# Altium PCB PCB1.PcbDoc (part 1 of 2)
Units mm, origin at the board's own origin, x right, y up, seen from the top; angles counter-clockwise.
Board outline 100 x 100 mm, 2 copper layers (Top Layer, Bottom Layer); 175 components, 138 nets, 674 pads, 476 vias.
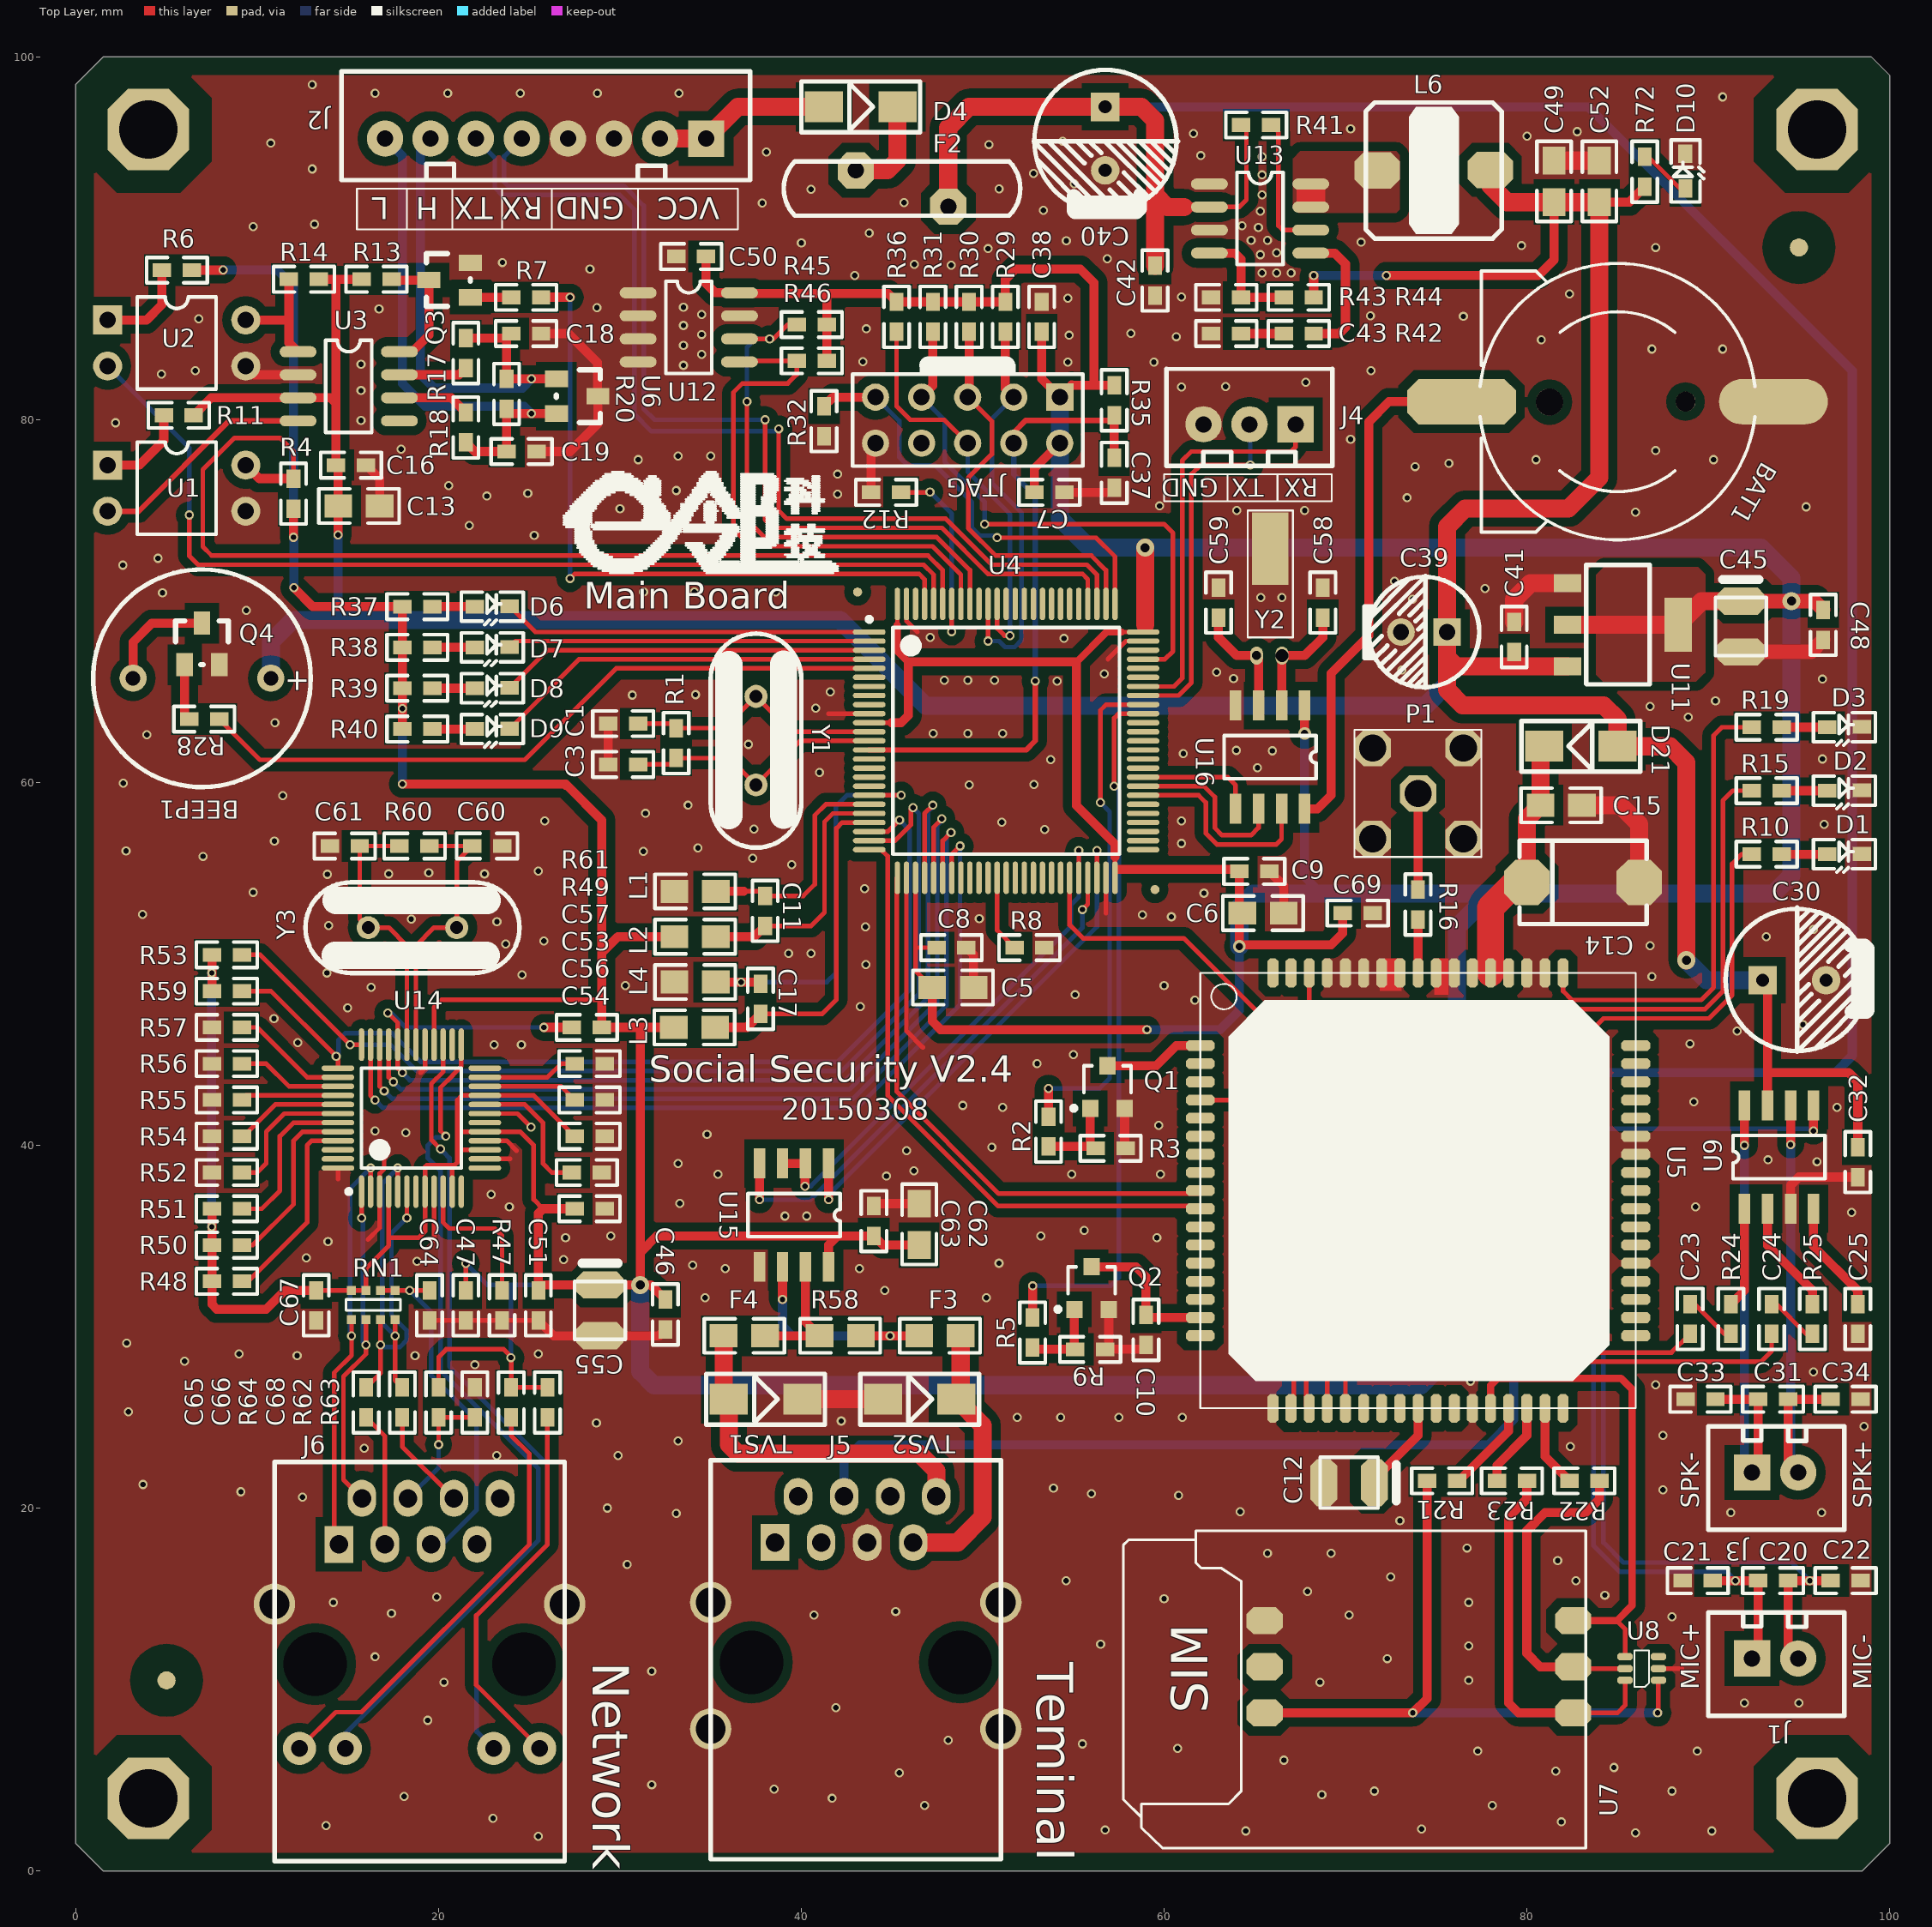
[diagram p0: Top Layer view]
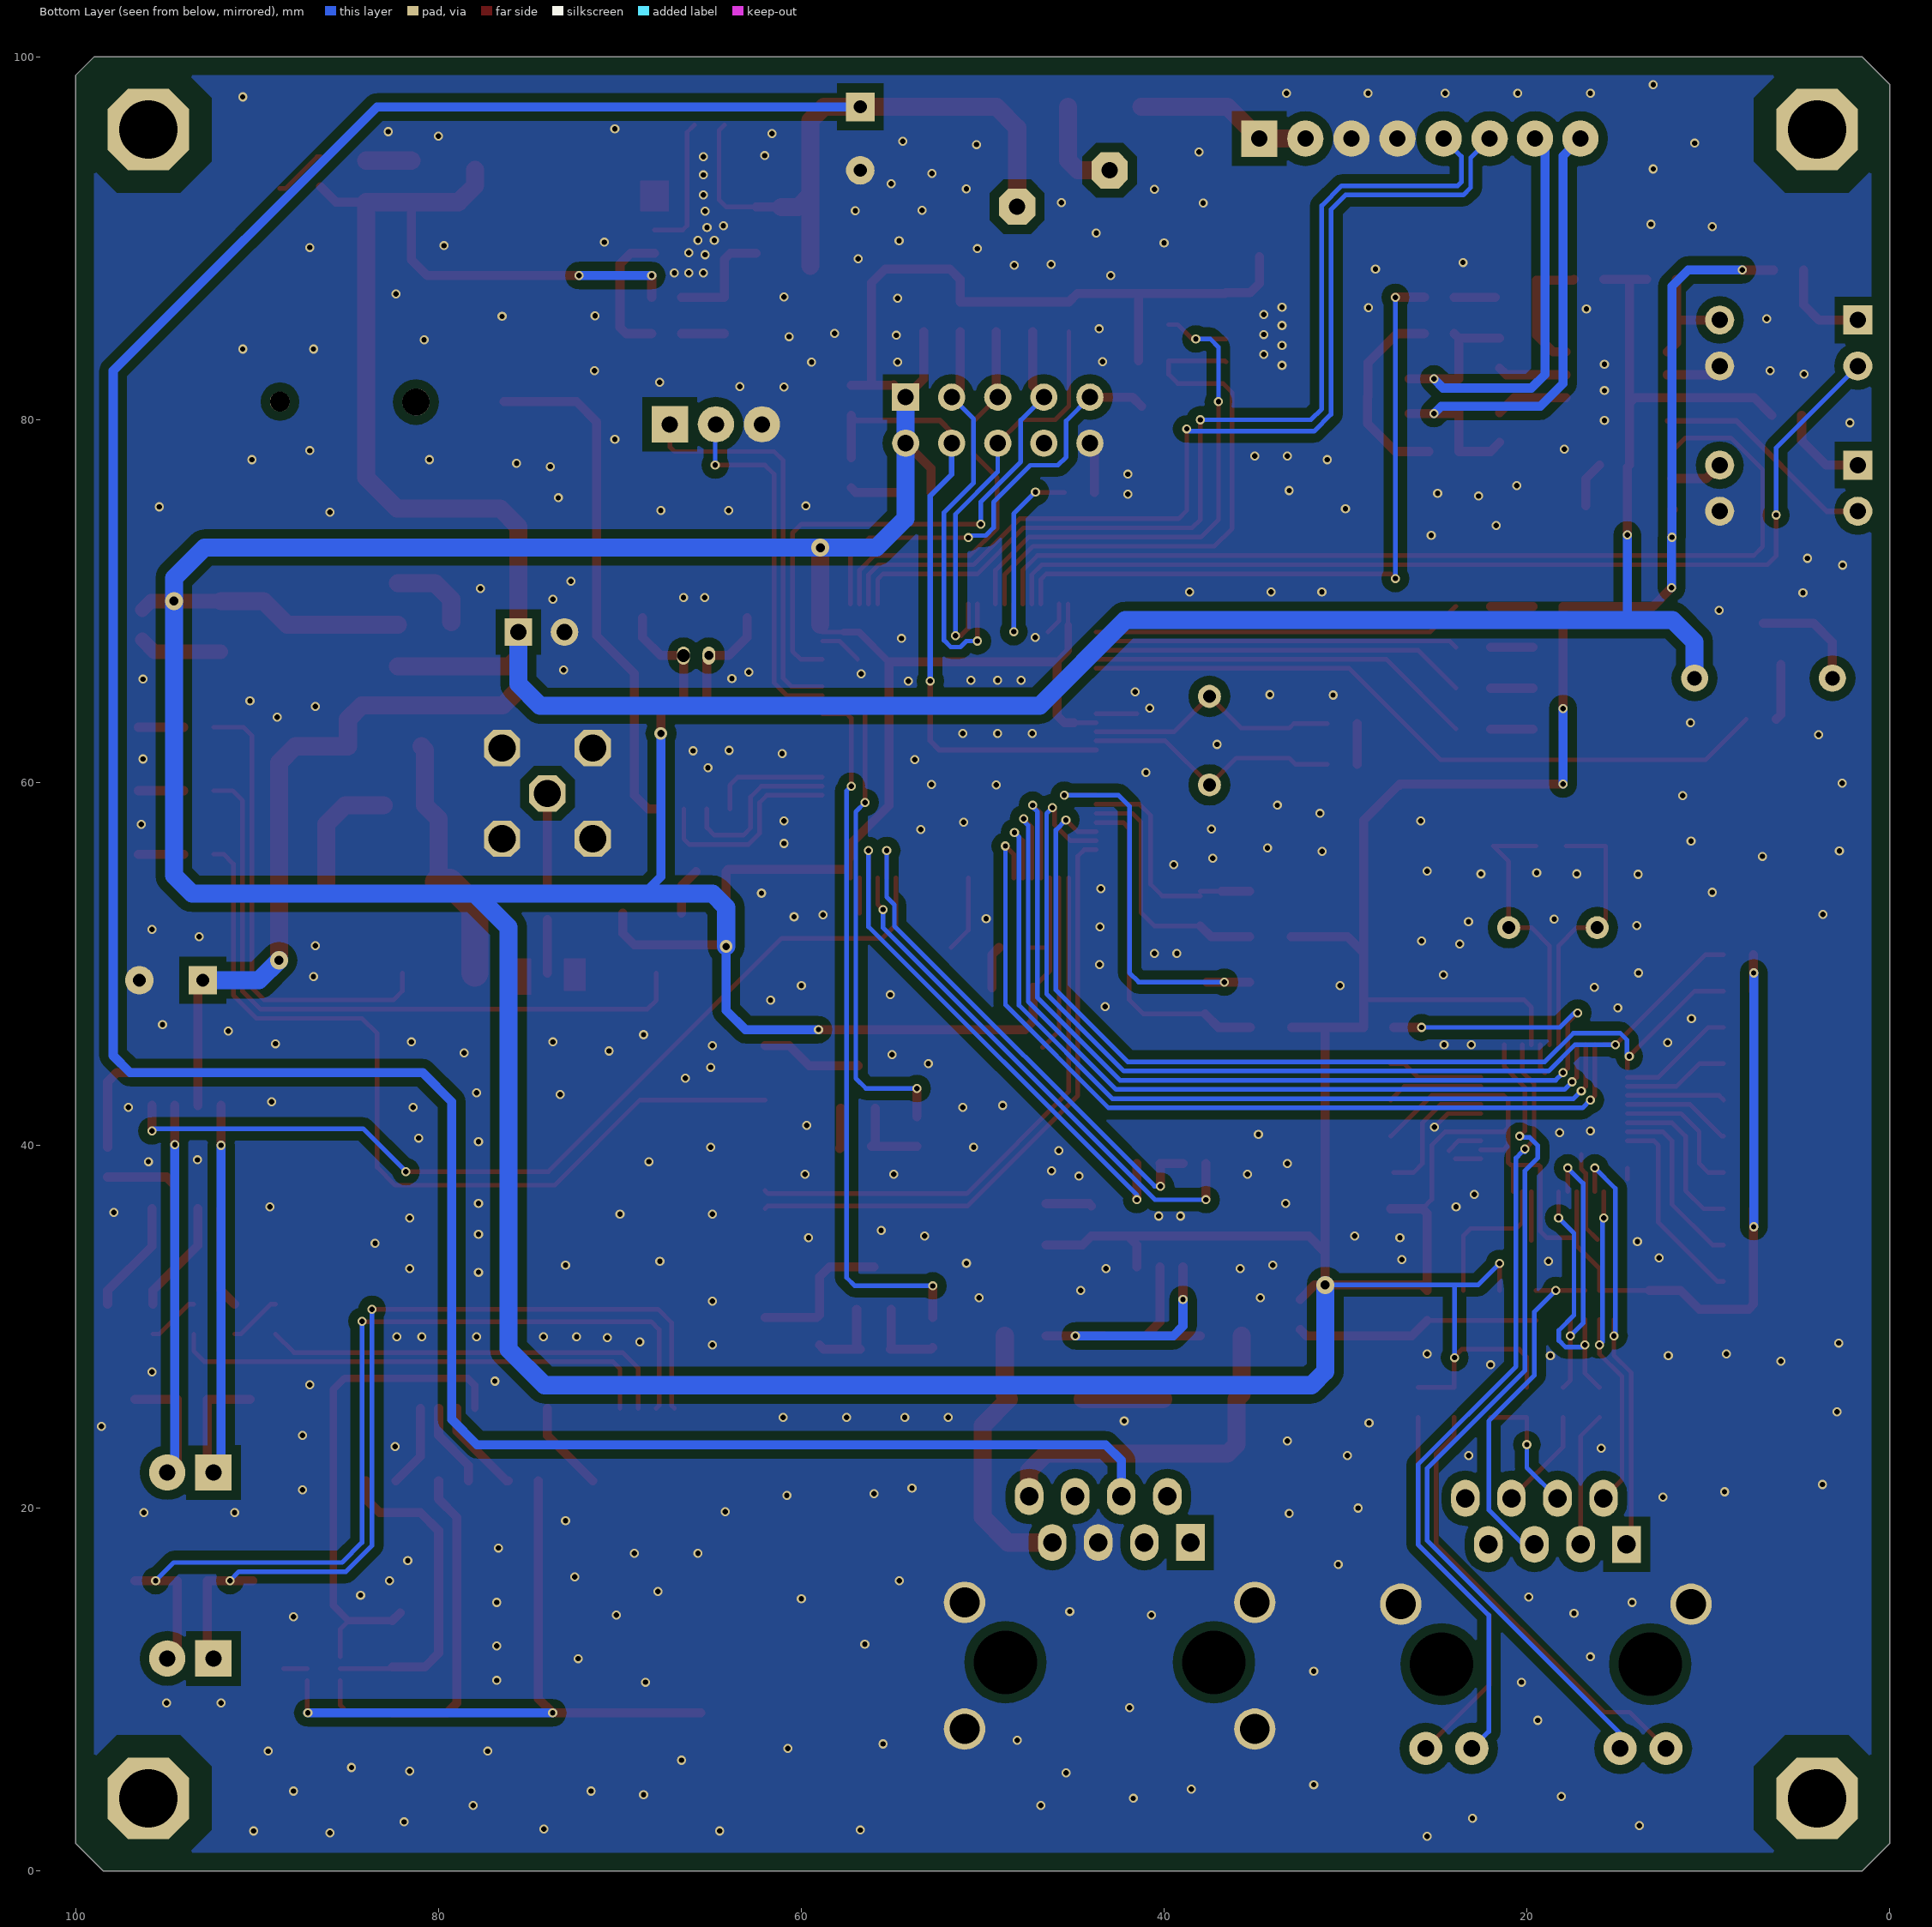
[diagram p1: Bottom Layer view, seen from below]

## Layer stack, top to bottom
Top Solder: solder mask 0.0102, Solder Resist, Dk 3.5
Top Layer: signal copper 0.0356
Dielectric 1: dielectric 0.32, FR-4, Dk 4.8
Bottom Layer: signal copper 0.0356
Bottom Solder: solder mask 0.0102, Solder Resist, Dk 3.5

## Board outline
0,1.5 0,98.5 1.5,100 99,100 100,99 100,1.5 98.5,0 1.5,0

## Design rules (kind name [scope] priority, off if disabled: settings)
Clearance [All] p1: gap=0.254
PolygonConnect [All] p1: connectstyle=Direct reliefconductorwidth=0.254 reliefentries=4 polygonreliefangle="90 Angle" airgapwidth=0.254
RoutingVias [All] p1: holewidth=0.711 width=1.27 viastyle="Through Hole" minholewidth=0.711 minwidth=1.27 maxholewidth=0.711 maxwidth=1.27
SolderMaskExpansion [All] p1: expansion=0.102
Width [All] p1: maxlimit=5 minlimit=0.254 preferedwidth=0.254
29 further rules are at their usual default settings.

## Components (designator, comment, footprint, x,y, rotation, side; value= is the part's Value field where it differs from the comment)
BAT1 "BATT" CR1220 85,81 r270 top locked
BEEP1 "BEEP" BEEP-12 10.75,65.75 r180 top locked
C1 "18p" 0603 31,63.25 r180 top locked
C3 "18p" 0603 31,61 r180 top locked
C5 "10uF/25V" 0805 49.5,48.7 r180 top locked
C6 "10uF/25V" 0805 66.6,52.8 r180 top locked
C7 "0.1uF" 0603 54.5,76 r180 top locked
C8 "0.1uF" 0603 49.1,50.9 r180 top locked
C9 "0.1uF" 0603 65.8,55.1 r180 top locked
C10 "104" 0603 59,29 r90 top locked
C11 "104" 0603 38,53.75 r270 top locked
C12 "100uF/6.3V" A-3528 68.8,21.4 r180 top
C13 "10uF" 0805 16.75,75.25 r180 top locked
C14 "1000uF/6.3V" 7343 80,54.5 r180 top locked
C15 "0.1uF" 0805 80.75,58.75 r0 top locked
C16 "0.1uF" 0603 16,77.5 r180 top locked
C17 "104" 0603 37.75,47.25 r90 top locked
C18 "470pF" 0603 24,84.75 r0 top locked
C19 "470pF" 0603 23.75,78.25 r0 top locked
C20 "10PF" 0603 92.75,16 r0 top locked
C21 "10PF" 0603 90.25,16 r180 top locked
C22 "10PF" 0603 96.75,16 r0 top locked
C23 "1uF" 0603 89,31.25 r270 top locked
C24 "1uF" 0603 93.5,31.25 r270 top locked
C25 "1uF" 0603 98.25,31.25 r270 top locked
C30 "470uF" RB3.5 96.5,49.1 r180 top locked
C31 "10PF" 0603 92.75,26 r0 top locked
C32 "0.1uF" 0603 98.25,38.25 r90 top locked
C33 "10PF" 0603 88.75,26 r0 top locked
C34 "10PF" 0603 96.75,26 r0 top locked
C37 "104" 0603 57.25,76.25 r90 top locked
C38 "104" 0603 53.25,86.5 r270 top locked
C39 "100uF/25V" RB2.54 75.6,68.3 r180 top locked
C40 "470uF/25V" RB3.5 56.75,93.75 r90 top locked
C41 "0.1uF" 0603 79.3,67.2 r90 top locked
C42 "0.1uF" 0603 59.5,88.5 r270 top locked
C43 "1nF" 0603 64.25,84.75 r180 top locked
C45 "100uF/6.3V" A-3528 91.8,67.2 r270 top
C46 "0.1uF" 0603 32.5,31.5 r270 top locked
C47 "0.1uF" 0603 21.5,32 r270 top locked
C48 "0.1uF" 0603 96.342,69.52 r270 top locked
C49 "10uF/16V" 0805 81.5,92 r90 top locked
C50 "104" 0603 34.75,89 r180 top locked
C51 "0.1uF" 0603 25.5,32 r270 top locked
C52 "10uF/16V" 0805 84,92 r90 top locked
C53 "0.1uF" 0603 27.5,40.5 r0 top locked
C54 "0.1uF" 0603 27.5,36.5 r0 top locked
C55 "100uF/6.3V" A-3528 28.9,29.5 r270 top
C56 "4.7uF" 0603 29,38.5 r180 top locked
C57 "10nF" 0603 27.5,42.5 r0 top locked
C58 "6P" 0603 68.75,70.75 r270 top locked
C59 "6P" 0603 63,70.75 r270 top locked
C60 "18p" 0603 23.5,56.5 r180 top locked
C61 "18p" 0603 14,56.5 r0 top locked
C62 "10uF/16V" 0805 46.5,34.5 r90 top locked
C63 "0.1uF" 0603 44,35 r90 top locked
C64 "10nF" 0603 19.5,32 r270 top locked
C65 "6.8nF" 0603 16,25 r90 top locked
C66 "6.8nF" 0603 18,25 r90 top locked
C67 "10nF" 0603 13.25,32 r270 top locked
C68 "0.1uF" 0603 22,25 r90 top locked
C69 "0.1uF" 0603 71.5,52.8 r180 top
D1 "LED" LED-0603 96.55,56.05 r0 top locked
D2 "LED-R" LED-0603 96.55,59.55 r0 top locked
D3 "LED-R" LED-0603 96.55,63.05 r0 top locked
D4 "SS34" SMB 41.25,97.25 r0 top locked
D6 "LED-R" LED-0603 22,69.7 r0 top locked
D7 "LED-R" LED-0603 22,67.45 r0 top locked
D8 "LED-R" LED-0603 22,65.2 r0 top locked
D9 "LED-R" LED-0603 22,62.95 r0 top locked
D10 "LED-R" LED-0603 88.75,92.75 r90 top locked
D21 "IN4007" SMB 85,62 r180 top locked
F2 "FUSE2" "FUSE RL60-110" 43,93.75 r180 top locked
F3 "FUSE2" 0805 46.5,29.5 r0 top locked
F4 "FUSE2" 0805 38,29.5 r180 top locked
J1 "SIP2A-2.54（带槽）" 2.54 97.5,14.25 r180 top locked
J2 "SIP8-2.54" 2.54-8 34.75,95.5 r180 top locked
J3 "2.54-2P" 2.54 97.5,24.5 r180 top locked
J4 "SIP3A-2.54" 2.54-3 67.25,79.75 r0 top locked
J5 "RJ45" RJ45-10P8L 51,11.5 r0 top locked
J6 "HR911105A" HR911105A 14.5,18 r0 top locked
JTAG "JTAG_10" JTAG_10 54.25,81.25 r180 top locked (schematic designator JTAG_1)
L1 "100R" 0805 33,54 r0 top locked
L2 "100R" 0805 33,51.5 r0 top locked
L3 "100R" 0805 35.25,46.5 r180 top locked
L4 "100R" 0805 33,49 r0 top locked
L6 "4.7uH" "INDUCTOR 7*7" 71.75,93.75 r180 top locked
P1 "COAX-M" ST-TH1 74,59.4 r0 top
Q1 "3904" SOT-23R 56.876,43.083 r0 top locked
Q2 "3904" SOT-23R 56,32 r0 top locked
Q3 "3904" SOT-23 21.75,86.75 r90 top locked
Q4 "3904" SOT-23 6,66.5 r0 top locked
R1 "1M" 0603 33.1,63 r270 top locked
R2 "4.7K" 0603 53.626,41.583 r270 top locked
R3 "10K" 0603 57.876,39.833 r180 top locked
R4 "1K" 0603 12,76.75 r270 top locked
R5 "4.7K" 0603 52.75,30.5 r270 top locked
R6 "201" 0603 4.75,88.25 r0 top locked
R7 "1K" 0603 24,86.75 r0 top locked
R8 "10K" 0603 51.75,50.9 r0 top locked
R9 "10K" 0603 56.75,28.75 r180 top locked
R10 "1K" 0603 94.05,56.05 r180 top locked
R11 "201" 0603 6.5,80.25 r180 top locked
R12 "10K" 0603 45.5,76 r180 top locked
R13 "1K" 0603 15.75,87.75 r0 top locked
R14 "1K" 0603 11.75,87.75 r0 top locked
R15 "1K" 0603 94.05,59.55 r180 top locked
R16 "0R" 0603 74,54.1 r270 top locked
R17 "10" 0603 21.5,84.5 r270 top locked
R18 "10" 0603 21.5,78.75 r90 top locked
R19 "1K" 0603 94.05,63.05 r180 top locked
R20 "120" 0603 23.75,82.25 r270 top locked
R21 "22" 0603 74.5,21.5 r0 top locked
R22 "22" 0603 84,21.5 r180 top locked
R23 "22" 0603 80,21.5 r180 top locked
R24 "1K" 0603 91.25,31.25 r270 top locked
R25 "1K" 0603 95.75,31.25 r270 top locked
R28 "1K" 0603 6.25,63.5 r0 top locked
R29 "10K" 0603 51.25,86.5 r270 top locked
R30 "10K" 0603 49.25,86.5 r270 top locked
R31 "10K" 0603 47.25,86.5 r270 top locked
R32 "10K" 0603 41.25,80.75 r270 top locked
R35 "10K" 0603 57.25,80.25 r90 top locked
R36 "10K" 0603 45.25,86.5 r270 top locked
R37 "1K" 0603 18,69.7 r0 top locked
R38 "1K" 0603 18,67.45 r0 top locked
R39 "1K" 0603 18,65.2 r0 top locked
R40 "1K" 0603 18,62.95 r0 top locked
R41 "10K" 0603 64.25,96.25 r0 top locked
R42 "20K" 0603 68.25,84.75 r180 top locked
R43 "20K" 0603 64.25,86.75 r180 top locked
R44 "56K" 0603 68.25,86.75 r180 top locked
R45 "4.7K" 0603 39.75,85.25 r0 top locked
R46 "4.7K" 0603 39.75,83.25 r0 top locked
R47 "12.4K" 0603 23.5,30.35 r90 top locked
R48 "10K" 0603 7.5,32.5 r0 top locked
R49 "10K" 0603 27.5,44.5 r0 top locked
R50 "10K" 0603 7.5,34.5 r0 top locked
R51 "10K" 0603 7.5,36.5 r0 top locked
R52 "10K" 0603 7.5,38.5 r0 top locked
R53 "10K" 0603 7.5,50.5 r0 top locked
R54 "10K" 0603 7.5,40.5 r0 top locked
R55 "10K" 0603 7.5,42.5 r0 top locked
R56 "10K" 0603 7.5,44.5 r0 top locked
R57 "10K" 0603 7.5,46.5 r0 top locked
R58 "120R" 0805 41,29.5 r0 top locked
R59 "10K" 0603 7.5,48.5 r0 top locked
R60 "1M" 0603 19.5,56.5 r180 top locked
R61 "10K" 0603 29,46.5 r180 top locked
R62 "270" 0603 24,26.65 r270 top locked
R63 "270" 0603 26,26.65 r270 top locked
R64 "10R" 0603 20,25 r90 top locked
R72 "1K" 0603 86.5,94.5 r270 top locked
RN1 "51R" 0603-4 18,32 r180 top locked
TVS1 "TVS" SMB 36,26 r0 top locked
TVS2 "TVS" SMB 44.5,26 r0 top locked
U1 "TLP521-1" DIP4 1.75,77.5 r0 top locked
U2 "TLP521-1" DIP4 1.75,85.5 r0 top locked
U3 "TAJ1050" SO-8 12.25,83.75 r0 top locked
U4 "STM32F103VET6" LQFP100_N 51.294,62.298 r0 top locked
U5 "SIM900" SIM-900 62,45.5 r270 top locked
U6 "TVS_CAN" SOT-23 26.5,82.25 r270 top locked
U7 "SIM" SIM-6P-T 83.25,1.25 r90 top locked
U8 "SMF05" SL70-6L 87.25,10.5 r180 top locked
U9 "SNAP01" sop-8 92,36.5 r90 top locked
U11 "LM1117" SOT-223 82.25,71 r270 top locked
U12 "24C02" SO-8 31,87 r0 top locked
U13 "AOZ1016" SO-8 62.5,93 r0 top locked
U14 "W5500" LQFP48_N 18.5,41.5 r90 top locked
U15 "MAX3485" SOP-8 41.5,39 r270 top locked
U16 "DS1302" SOP-8 67.75,64.25 r270 top locked
Y1 "8MHz" XTAL_US 37.5,64.75 r270 top locked
Y2 "32.768KHz" CS206 66.5,67 r270 top locked
Y3 "25MHz" XTAL_US 21,52 r180 top locked
? "Comment" e邻 30.1,71.8 r0 top

## Footprints (in the part's own frame and the unit in brackets; to place one, negate y for a bottom-side part, rotate by r counter-clockwise, add the part's x,y. Pads: shape width x height; smd on the part's side, far side on the other; paste and mask are expansions set on the pad)
2.54 [mm]
  rect 2x2 hole 0.9: 1(5.08,2.54)
  round 2 hole 0.9: 2(2.54,2.54)
  silkscreen extent 0,0 7.5,5.7
2.54-3 [mm]
  rect 2x2 hole 0.9: 1(0,0)
  round 2 hole 0.9: 2(-2.54,0) 3(-5.08,0)
  silkscreen extent -7.11,-2.29 2.03,3.05
2.54-8 [mm]
  rect 2x2 hole 0.9: 1(0,0)
  round 2 hole 0.9: 2(2.54,0) 3(5.08,0) 4(7.62,0) 5(10.16,0) 6(12.7,0) 7(15.2,0) 8(17.7,0)
  silkscreen extent -2.43,-3.71 20.1,2.29
0603 [mil]
  rect 40x30 smd: 1(0,0) 2(65,0)
  silkscreen extent -33,-28 98,28
0603-4 [mm]
  rect 0.5x0.5 smd: 1(0.4,0) 2(0.4,1.6) 3(1.2,0) 4(1.2,1.6) 5(2,0) 6(2,1.6) 7(2.8,0) 8(2.8,1.6)
  silkscreen extent 0.1,0.5 3.1,1.1
0805 [mil]
  rect 60x50 smd: 1(0,0) 2(90,0)
  silkscreen extent -42,-37 132,37
7343 [mm]
  oct 2.5x2.5 smd: 1(0,0) 2(-6.2,0)
  silkscreen extent -6.6,-2.3 0.4,2.3
A-3528 [mm]
  oct 1.5x2.6 smd: 1(-2.8,0) 2(0,0)
  silkscreen extent -4,-1.4 0.2,1.4
BEEP-12 [mm]
  round 1.5 hole 0.8: 1(0,0) 2(7.6,0)
  silkscreen extent -2.2,-6 9.8,6
CR1220 [mm]
  round 1.1 hole 1.1 unplated: 0(0,3.748)
  round 1.5 hole 1.5 unplated: 0(0.025,-3.752)
  oct 2.5x6 smd: 1(0,-8.602)
  oval 2.5x6 smd: 2(0,8.598)
  silkscreen extent -7.62,-7.58 7.62,7.57
CS206 [mm]
  oval 1x0.7 hole 0.7: 1(0,0)
  oval 1x0.7 hole 0.5: 2(0,-1.4)
  rect 4x2 smd: 3(-5.9,-0.65)
  silkscreen extent -8,-1.9 -1,0.6
DIP4 [mm]
  rect 1.6x1.6 hole 0.9: 1(0,0)
  round 1.6 hole 0.9: 2(0,-2.54) 3(7.62,-2.54) 4(7.62,0)
  silkscreen extent 1.63,-3.81 5.99,1.27
e邻 [mm]
  silkscreen extent -3.2,-0.25 11.91,5.33
"FUSE RL60-110" [mm]
  oct 2x2 hole 0.9: 1(0,0) 2(-5.1,2)
  silkscreen extent -9.07,-0.5 3.97,2.5
HR911105A [mil]
  rect 62x80 hole 40: 1(0,0)
  oval 62x80 hole 40: 2(50,100) 3(100,0) 4(150,100) 5(200,0) 6(250,100) 7(300,0) 8(350,100)
  round 72 hole 36: 9(-85.63,-442.91) 10(14,-442.91) 11(335.87,-442.91) 12(436,-442.91)
  round 90 hole 65: 13(-139.76,-129.92) 14(490.16,-129.92)
  round 0 hole 137.8: ""(-51.18,-259.84) ""(401.58,-259.84)
  Bottom Layer lines w10: 14,-442.91 14,-418.17
  silkscreen extent -140,-687 490,179
"INDUCTOR 7*7" [mm]
  oct 2.5x2 smd: 1(0,0) 2(-6.239,-0.026)
  silkscreen extent -6.86,-3.74 0.64,3.76
JTAG_10 [mm]
  rect 1.5x1.5 hole 0.9: 1(0,0)
  round 1.5 hole 0.9: 2(0,2.54) 3(2.54,0) 4(2.54,2.54) 5(5.08,0) 6(5.08,2.54) 7(7.62,0) 8(7.62,2.54) 9(10.16,0) 10(10.16,2.54)
  silkscreen extent -1.27,-1.78 11.43,3.81
LED-0603 [mil]
  rect 40x30 smd: 1(0,0) 2(75.4,0.63)
  silkscreen extent -29,-39 105,31
LQFP48_N [mm] "Thin QFP, 48-Leads, Body 7x7mm, Pitch 0.5mm, IPC Medium Density"
  oval 1.8x0.3 smd: 1(-4.05,2.75) 2(-4.05,2.25) 3(-4.05,1.75) 4(-4.05,1.25) 5(-4.05,0.75) 6(-4.05,0.25) 7(-4.05,-0.25) 8(-4.05,-0.75) 9(-4.05,-1.25) 10(-4.05,-1.75) 11(-4.05,-2.25) 12(-4.05,-2.75) 25(4.05,-2.75) 26(4.05,-2.25) 27(4.05,-1.75) 28(4.05,-1.25) 29(4.05,-0.75) 30(4.05,-0.25) 31(4.05,0.25) 32(4.05,0.75) 33(4.05,1.25) 34(4.05,1.75) 35(4.05,2.25) 36(4.05,2.75)
  oval 0.3x1.8 smd: 13(-2.75,-4.05) 14(-2.25,-4.05) 15(-1.75,-4.05) 16(-1.25,-4.05) 17(-0.75,-4.05) 18(-0.25,-4.05) 19(0.25,-4.05) 20(0.75,-4.05) 21(1.25,-4.05) 22(1.75,-4.05) 23(2.25,-4.05) 24(2.75,-4.05) 37(2.75,4.05) 38(2.25,4.05) 39(1.75,4.05) 40(1.25,4.05) 41(0.75,4.05) 42(0.25,4.05) 43(-0.25,4.05) 44(-0.75,4.05) 45(-1.25,4.05) 46(-1.75,4.05) 47(-2.25,4.05) 48(-2.75,4.05)
  silkscreen extent -4.17,-2.75 2.75,3.57, body extent -3.5,-3.5 3.5,3.5, height 1.6
LQFP100_N [mm] "Thin QFP, 100-Leads, Body 14x14mm, Pitch 0.5mm, IPC Medium Density"
  oval 1.8x0.3 smd: 1(-7.55,6) 2(-7.55,5.5) 3(-7.55,5) 4(-7.55,4.5) 5(-7.55,4) 6(-7.55,3.5) 7(-7.55,3) 8(-7.55,2.5) 9(-7.55,2) 10(-7.55,1.5) 11(-7.55,1) 12(-7.55,0.5) 13(-7.55,0) 14(-7.55,-0.5) 15(-7.55,-1) 16(-7.55,-1.5) 17(-7.55,-2) 18(-7.55,-2.5) 19(-7.55,-3) 20(-7.55,-3.5) 21(-7.55,-4) 22(-7.55,-4.5) 23(-7.55,-5) 24(-7.55,-5.5) 25(-7.55,-6) 51(7.55,-6) 52(7.55,-5.5) 53(7.55,-5) 54(7.55,-4.5) 55(7.55,-4) 56(7.55,-3.5) 57(7.55,-3) 58(7.55,-2.5) 59(7.55,-2) 60(7.55,-1.5) 61(7.55,-1) 62(7.55,-0.5) 63(7.55,0) 64(7.55,0.5) 65(7.55,1) 66(7.55,1.5) 67(7.55,2) 68(7.55,2.5) 69(7.55,3) 70(7.55,3.5) 71(7.55,4) 72(7.55,4.5) 73(7.55,5) 74(7.55,5.5) 75(7.55,6)
  oval 0.3x1.8 smd: 26(-6,-7.55) 27(-5.5,-7.55) 28(-5,-7.55) 29(-4.5,-7.55) 30(-4,-7.55) 31(-3.5,-7.55) 32(-3,-7.55) 33(-2.5,-7.55) 34(-2,-7.55) 35(-1.5,-7.55) 36(-1,-7.55) 37(-0.5,-7.55) 38(0,-7.55) 39(0.5,-7.55) 40(1,-7.55) 41(1.5,-7.55) 42(2,-7.55) 43(2.5,-7.55) 44(3,-7.55) 45(3.5,-7.55) 46(4,-7.55) 47(4.5,-7.55) 48(5,-7.55) 49(5.5,-7.55) 50(6,-7.55) 76(6,7.55) 77(5.5,7.55) 78(5,7.55) 79(4.5,7.55) 80(4,7.55) 81(3.5,7.55) 82(3,7.55) 83(2.5,7.55) 84(2,7.55) 85(1.5,7.55) 86(1,7.55) 87(0.5,7.55) 88(0,7.55) 89(-0.5,7.55) 90(-1,7.55) 91(-1.5,7.55) 92(-2,7.55) 93(-2.5,7.55) 94(-3,7.55) 95(-3.5,7.55) 96(-4,7.55) 97(-4.5,7.55) 98(-5,7.55) 99(-5.5,7.55) 100(-6,7.55)
  silkscreen extent -7.67,-6.25 6.25,6.82, body extent -7,-7 7,7, height 1.6
RB2.54 [mil]
  rect 60x60 hole 35: 1(0,0)
  round 60 hole 35: 2(100,0)
  silkscreen extent -70,-121 179,120
RB3.5 [mil]
  rect 62x62 hole 28: 1(137.8,0)
  round 62 hole 28: 2(0,0)
  silkscreen extent -92,-158 218,155
RJ45-10P8L [mil]
  rect 62x80 hole 40: 1(-490.16,259.84)
  oval 62x80 hole 40: 2(-440.16,359.84) 3(-390.16,259.84) 4(-340.16,359.84) 5(-290.16,259.84) 6(-240.16,359.84) 7(-190.16,259.84) 8(-140.16,359.84)
  round 90 hole 65: 9(-629.92,-144.88) 9(-629.92,129.92) 10(0,-144.88) 10(0,129.92)
  round 0 hole 137.8: ""(-541.34,0) ""(-88.58,0)
  silkscreen extent -630,-428 0,439
SIM-6P-T [mm]
  oct 1.5x2 smd: 1(7.46,17.7) 2(10,17.7) 3(12.54,17.7) 4(7.46,0.7) 5(10,0.7) 6(12.54,0.7)
  silkscreen extent 0,0 17.5,25.5
SIM-900 [mm]
  oct 0.6x1.6 smd: 1(0,0) 2(1,0) 3(2,0) 4(3,0) 5(4,0) 6(5,0) 7(6,0) 8(7,0) 9(8,0) 10(9,0) 11(10,0) 12(11,0) 13(12,0) 14(13,0) 15(14,0) 16(15,0) 17(16,0) 35(16,24) 36(15,24) 37(14,24) 38(13,24) 39(12,24) 40(11,24) 41(10,24) 42(9,24) 43(8,24) 44(7,24) 45(6,24) 46(5,24) 47(4,24) 48(3,24) 49(2,24) 50(1,24) 51(0,24)
  oct 1.6x0.6 smd: 18(20,4) 19(20,5) 20(20,6) 21(20,7) 22(20,8) 23(20,9) 24(20,10) 25(20,11) 26(20,12) 27(20,13) 28(20,14) 29(20,15) 30(20,16) 31(20,17) 32(20,18) 33(20,19) 34(20,20) 52(-4,20) 53(-4,19) 54(-4,18) 55(-4,17) 56(-4,16) 57(-4,15) 58(-4,14) 59(-4,13) 60(-4,12) 61(-4,11) 62(-4,10) 63(-4,9) 64(-4,8) 65(-4,7) 66(-4,6) 67(-4,5) 68(-4,4)
  silkscreen extent -4,0 20,24
SL70-6L [mm]
  oct 0.85x0.4 smd: 1(0,0) 2(0,-0.65) 3(0,-1.3) 4(1.829,-1.3) 5(1.829,-0.65) 6(1.829,0)
  silkscreen extent 0.51,-1.64 1.32,0.36
SMB [mm]
  rect 2.1x1.7 smd: 1(0,0) 2(4.05,0)
  silkscreen extent -1.25,-1.4 5.3,1.4
SO-8 [mil]
  oval 80x24 smd: 1(0,0) 2(0,-50) 3(0,-100) 4(0,-150) 5(220,-150) 6(220,-100) 7(220,-50) 8(220,0)
  silkscreen extent 60,-175 160,25
sop-8 [mil]
  rect 65x25 smd: 1(0,0) 2(0,-50) 3(0,-100) 4(0,-150) 5(224.41,-150) 6(224.41,-100) 7(224.41,-50) 8(224.41,0)
  silkscreen extent 65,-175 159,25
SOP-8 [mil]
  rect 65x25 smd: 1(0,0) 2(0,-50) 3(0,-100) 4(0,-150) 5(224.41,-150) 6(224.41,-100) 7(224.41,-50) 8(224.41,0)
  silkscreen extent 65,-175 159,25
SOT-23 [mil]
  rect 36x50 smd: 1(0,0) 2(75,0) 3(37.5,90)
  silkscreen extent -20,0 95,95
SOT-23R [mm]
  rect 0.9x0.95 smd: 1(0.95,-1.048) 2(-0.95,-1.048) 3(0,1.302)
  silkscreen extent -1.98,-1.17 1.3,1.3
SOT-223 [mm]
  rect 1x1.5 smd: 1(0,0) 2(2.3,0) 3(4.6,0)
  rect 3x1.5 smd: 4(2.3,6.096)
  silkscreen extent -1,1.02 5.59,4.52
ST-TH1 [mm]
  oct 2x2 hole 1.5: 1(0,0) 2(-2.5,2.5) 3(2.5,2.5) 4(2.5,-2.5) 5(-2.5,-2.5)
  silkscreen extent -3.5,-3.5 3.5,3.5
XTAL_US [mil]
  round 50 hole 28: 1(0,0) 2(192.13,0)
  silkscreen extent -136,-98 328,98

## Part data
BAT1: library part BAT
C1 C3 C18 C19 C23 C24 C25 C37 C38 C50: library part CAP, "陶瓷电容"
C5 C6 C7 C8 C9 C11 C12 C13 C14 C16 C17 C30 C32 C39 C40 C41 C42 C43 C46 C47 C48 C49 C51 C52 C53 C54 C57 C62 C63 C64 C67 C68 C69: library part CAP
C10 C15 C20 C21 C22 C31 C33 C34 C58 C59 C60 C61 C65 C66: library part C
C45 C55: library part CAP, "钽电容"
C56: library part CAP, "0.1uF"
D1 D6 D7 D8 D9 D10: library part LED-RED, "绿色LED"
D2: library part LED-RED, "红色LED"
D3: library part LED-RED, "黄色LED"
D4 D21: library part DIODE
F2: "RL60-110"
F3 F4: "SMD0805P010TS"
J1 J3: library part SIP2A-2.50（带槽）
J4: library part SIP3A-2.50（带槽）, "2.54-3P"
L1 L2 L3 L4 L6: library part INDUCTOR
P1: "SMA-J-P-H-ST-TH1"
Q1 Q2: library part NPN, "8050/BCW846/BCW847"
Q3 Q4: library part NPN1
R1 R4 R6 R7 R11 R13 R14 R17 R18 R20 R24 R25 R28 R29 R30 R31 R32 R35 R36 R37 R38 R39 R40 R45 R46 R58 R72: library part RES-1%, "高精度电阻"
R2 R3 R5 R9 R10 R16: library part Res
R8 R12 R15 R19 R21 R22 R23 R41 R42 R43 R44 R47 R48 R49 R50 R51 R52 R53 R54 R55 R56 R57 R59 R60 R61 R62 R63 R64: library part RES1
RN1: library part RESPACK
TVS1 TVS2: "SMBJ6.0CA"
U1 U2: library part TLP521, "光耦"
U4: "STM32 ARM-based 32-bit MCU with 64 Kbytes Flash, 100-pin LQFP, Industrial Temperature"
U6: "NUP2105L"
U7: "手机SIM卡"
U12: library part 24C256
U14: "以太网"
U16: "实时时钟"
Y1 Y2 Y3: library part XTAL, "Crystal Oscillator"

## Free pads (board coordinates)
  round 1 smd mask+1: 0(5,10.5) 0(95,89.5)
  round 0.5 smd: 0(43.1,70.5) 1(59.5,54.1)
  oct 4.5x4.5 hole 3.2: ""(4,4) ""(4,96) ""(96,4) ""(96,96)

## Via types
v1: diameter 0.5, hole 0.3, Top Layer to Bottom Layer, tented both sides, 470 vias
v2: diameter 1, hole 0.5, Top Layer to Bottom Layer, tented both sides, 4 vias
v3: diameter 0.7, hole 0.4, Top Layer to Bottom Layer, tented both sides, 2 vias

## Nets (pads, with @x,y where several pads share a name; then routed paths per layer and width w, separated by ;. In a path a pad name is that pad's centre, name@x,y a point inside that pad or via, vN(x,y) a via of type N, cw(c..) or ccw(c..) an arc to the next point about the centre after c; other vN are vias at no path point)
485_A: F3.2 J5.7 TVS2.2 | length 15.1
  Top Layer w1: J5.7@46.17,18.1 48.6,18.1 50,19.5 50,24.55 TVS2.2@48.55,26 48.786,26.236 F3.2@48.786,29.5
485_B: F4.2 J5.8 TVS1.1 | length 19.6
  Top Layer w1: F4.2@35.714,29.5 35.714,26.286 TVS1.1@36,26 36,23.5 36.5,23 46.5,23 47.44,22.06 J5.8@47.44,20.64
BEEP: R28.2 U4.5 | length 38.9
  Top Layer w0.254: R28.2@7.901,63.5 10.151,61.25 24.75,61.25 29.798,66.298 U4.5@43.744,66.298
BOOT0: R12.1 U4.94 | length 11.3
  Top Layer w0.254: R12.1@45.5,76 47.069,76 v1(47.092,76.022) ; v1(48.294,68.317) U4.94@48.294,69.848
  Bottom Layer w0.254: v1(47.092,76.022) 48.294,74.82 v1(48.294,68.317)
BOOT1: R8.1 U4.37 | length 4.2
  Top Layer w0.254: U4.37@50.794,54.748 50.794,51.856 R8.1@51.75,50.9
CAN_RXD: R4.1 U1.4 U4.95 | length 57.9
  Top Layer w0.254: R4.1@12,76.75 12,78.25 11.25,79 8.75,79 7,77.25 7,73 7.484,72.516 46.984,72.516 47.794,71.706 U4.95@47.794,69.848
  Top Layer w0.52: U1.4@9.37,77.5 10.12,76.75 R4.1@12,76.75
CAN_TXD: U2.2 U4.96 | length 55.4
  Top Layer w0.254: v1(6.25,74.75) 6.25,72.5 6.742,72.008 46.742,72.008 47.294,71.456 U4.96@47.294,69.848
  Bottom Layer w0.254: U2.2@1.75,82.96 6.25,78.46 v1(6.25,74.75)
CANH: C18.1 J2.7 R17.1 R20.1 U6.1 | length 27.5
  Top Layer w0.5: R17.1@21.5,84.5 C18.1@23.75,84.5 ; C18.1@24,84.75 C18.1@23.75,84.5 ; U6.1@26.5,82.25 v1(25.125,82.25) R20.1@23.75,82.25 C18.1@23.75,84.5
  Bottom Layer w0.5: J2.7@19.55,95.5 19,94.95 19,82.5 19.75,81.75 24.625,81.75 v1(25.125,82.25)
CANL: C19.1 J2.8 R18.1 R20.2 U6.2 | length 29.6
  Top Layer w0.5: R18.1@21.5,78.75 22,78.25 C19.1@23.75,78.25 R20.2@23.75,80.345 ; U6.2@26.5,80.345 v1(25.125,80.345) R20.2@24.004,80.345 ; R20.2@23.75,80.345 R20.2@24.004,80.345 ; R20.2@23.75,80.345 R20.2@23.75,80.599 R20.2@24.004,80.345
  Bottom Layer w0.5: J2.8@17.05,95.5 18,94.55 18,82 19.25,80.75 24.72,80.75 v1(25.125,80.345)
DS_IO: U4.58 U16.6 | length 9.7
  Top Layer w0.254: U4.58@58.844,59.798 62.202,59.798 62.8,59.2 62.8,57.5 63.2,57.1 64.8,57.1 65.21,57.51 U16.6@65.21,58.55
DS_RST: U4.59 U16.5 | length 6.6
  Top Layer w0.254: U4.59@58.844,60.298 63.502,60.298 63.94,59.86 U16.5@63.94,58.55
DS_SCLK: U4.57 U16.7 | length 11.5
  Top Layer w0.254: U4.57@58.844,59.298 61.902,59.298 62.3,58.9 62.3,57.2 62.908,56.592 66.192,56.592 66.48,56.88 U16.7@66.48,58.55
GND: BAT1.2 C1.2 C3.2 C5.1 C6.1 C7.1 C8.1 C9.1 C10.1 C12.2 C13.1 C14.2 C15.2 C16.1 C18.2 C19.2 C21.2 C22.2 C25.2 C30.2 C32.1 C33.1 C34.2 C37.1 C38.1 C39.2 C40.2 C41.2 C42.2 C43.2 C45.2 C46.2 C47.2 C48.2 C49.2 C50.2 C51.2 C52.2 C53.2 C54.2 C55.2 C56.1 C57.2 C58.1 C59.1 C60.1 C61.1 C62.2 C63.2 C64.2 C67.2 C68.2 C69.1 D1.2 D2.2 D3.2 D10.2 J2.3 J2.4 J4.3 J5.5 J5.9 J5.10 J6.13 J6.14 JTAG.10 L1.1 L4.1 P1.2 P1.3 P1.4 P1.5 Q1.1 Q2.1 Q3.2 Q4.2 R3.1 R8.2 R9.1 R12.2 R32.2 R43.2 R47.1 R49.2 R52.1 R54.1 R55.1 R56.1 R57.1 TVS1.2 TVS2.1 U1.3 U2.3 U3.2 U4.10 U4.27 U4.49 U4.74 U4.99 U5.18 U5.29 U5.39 U5.45 U5.46 U5.53 U5.54 U5.58 U5.59 U5.61 U5.62 U5.63 U5.64 U5.65 U6.3 U7.3 U8.2 U9.3 U11.1 U12.1 U12.2 U12.3 U12.4 U12.7 U13.1 U13.3 U14.3 U14.9 U14.14 U14.16 U14.19 U14.29 U14.48 U15.5 U16.4 Y2.3 | length 116.4
  Top Layer w0.254: 14.45,38.15 U14.48@14.45,38.75 ; 16.1,34.8 16.75,35.45 U14.3@16.75,37.45 16.75,38.45 17,38.7 17,39.5 ; 19,44 19.25,44.25 U14.29@19.25,45.55 ; C64.2@19.5,30.349 C47.2@21.5,30.349 C51.2@25.5,30.349 ; 19.75,34.75 U14.9@19.75,37.45 ; U14.14@22.55,39.25 23.95,39.25 ; U14.16@22.55,40.25 23.75,40.25 24.3,39.7 ; U14.19@22.55,41.75 24.35,41.75 v1(25.1,41) ; 41.502,63.798 U4.10@43.744,63.798 ; U4.27@45.794,54.748 45.794,46.306 46.7,45.4 ; U4.99@45.794,69.848 45.794,68.906 46.4,68.3 ; 56.794,52.806 U4.49@56.794,54.748 ; 56.9,66.8 57.898,67.798 U4.74@58.844,67.798 ; U8.2@87.25,11.15 88.55,11.15
  Top Layer w0.5: U2.3@9.37,82.96 9.85,82.48 U3.2@12.25,82.48 ; C16.1@16,77.5 16.75,76.75 C13.1@16.75,75.25 ; C19.2@25.401,78.25 27.25,78.25 28.786,79.786 U6.3@28.786,81.298 ; C51.2@25.5,30.349 26.349,29.5 29,29.5 32.151,29.5 C46.2@32.5,29.849 ; C18.2@25.651,84.75 27.15,84.75 28.75,83.15 U6.3@28.75,81.298 ; C3.2@29.349,61 C1.2@29.349,63.25 ; R12.2@43.849,76 43.849,78.469 JTAG.10@44.09,78.71 ; C63.2@44,36.651 44.135,36.786 C62.2@46.5,36.786 ; C8.1@49.1,50.9 49.5,50.5 C5.1@49.5,48.7 ; C7.1@54.5,76 57,76 C37.1@57.25,76.25 ; Q2.1@56.95,30.952 56.95,28.95 R9.1@56.75,28.75 58.75,28.75 C10.1@59,29 ; Q1.1@57.826,42.035 57.826,39.883 R3.1@57.876,39.833 ; C9.1@65.8,55.1 66.6,54.3 C6.1@66.6,52.8 ; U9.3@94.54,36.5 94.54,37.79 95,38.25 C32.1@98.25,38.25
  Top Layer w0.8: C45.2@92,67.2 95.673,67.2 C48.2@96.342,67.869
  Top Layer w1: TVS1.2@40.05,26 TVS2.1@44.5,26 ; C41.2@79.3,68.851 79.3,70.1 80.2,71 U11.1@82.25,71 ; C49.2@81.5,94.286 C52.2@84,94.286 ; C15.2@83.036,58.75 85.15,58.75 86.2,57.7 C14.2@86.2,54.5
  other v1: 25.5,1.9 86,2.1 64.5,2.2 90.2,2.2 56.75,2.25 74.2,2.3 13.8,2.5 81.9,2.7 23,2.9 46.8,3.6 78.1,3.6 41.7,4 18.1,4.1 68.7,4.2 71.6,4.4 88,4.4 38.5,4.5 31.75,4.75 45.4,5.4 81.6,5.5 84.8,5.7 66.6,6.1 77.3,6.6 89.4,6.6 60.75,6.75 55.5,7 48.1,7.2 19.4,8.3 41.9,9 92,9.25 95,9.25 20.3,10.4 68.6,10.4 76.8,10.5 31.75,11 72.3,11.7 16.5,11.8 76.8,12.4 56.5,12.5 88,14 40.7,14.1 70.2,14.1 17.4,14.2 45.2,14.3 14.2,14.8 76.8,14.8 60,15 19.9,15.1 84.3,15.2 67.9,15.4 54.6,16 82.7,16 72.5,16.2 30.4,16.9 81.7,17.1 65.7,17.5 69.2,17.5 76.7,17.8 73,19.3 33.1,19.7 91.25,19.75 96.25,19.75 64.2,19.8 29.3,20 12.5,20.6 60.8,20.7 56,20.8 9.1,20.9 87.5,21 53.9,21.1 3.7,21.3 23.2,22.9 29.9,22.9 15.9,23.3 82.4,23.4 33.2,23.7 87.5,24 98.6,24.5 28.7,24.7 42.2,24.8 51.9,25 54.3,25 57.5,25 61,25 2.9,25.3 87.1,26.8 76.9,27 95.8,27.5 22,27.9 6,28.1 12.2,28.4 18.7,28.4 9,28.5 25.5,28.5 64.9,29 2.8,29.1 68.91,29.159 70.7,29.4 72.39,29.439 74.219,29.439 77.902,29.439 80.924,29.439 82.296,29.439 64.9,31.4 34.7,31.6 50.2,31.6 44.6,32 77.8,33 35.8,33.2 43.2,33.2 81.6,33.2 34,33.4 73,33.4 50.9,33.5 18.8,33.6 67.8,33.6 26.9,33.7 12.7,33.8 83.5,34.6 13.9,34.7 27,34.9 59.6,34.9 29.5,35 53.2,35 77.8,35.1 55.6,35.3 81.6,36 39.1,36.1 40.3,36.1 64.9,36.2 70,36.2 97.9,36.3 23.9,36.6 89.3,36.6 33.3,36.8 77.8,36.8 22.9,37.3 44.7,38.3 35.4,38.4 54.9,38.4 59.8,38.4 46.2,38.6 33.2,39 68.4,39.1 96,39.1 93.3,39.2 45.8,39.7 50.5,39.9 65,39.9 77.8,40.2 81.1,40.4 34.8,40.6 18.2,40.7 16.5,40.8 59.7,41.1 51.1,42.1 81.4,42.1 97.1,42.1 48.9,42.2 89.2,42.4 73.3,42.8 77.9,42.9 66.4,43.7 65,44.3 53,44.5 55,45 78.6,45.1 70.6,45.2 64.9,45.5 23.063,45.542 24.562,45.542 89,45.6 12.243,45.669 73.7,45.7 81.5,45.7 68.7,46.1 91.6,46.3 95.225,46.66 10.922,46.99 14.986,47.574 43.256,47.65 61.7,48 55.1,48.3 16.281,48.717 30.3,48.8 60,48.8 86.9,49.3 24.6,49.4 13.843,49.505 43.561,49.962 39.294,50.571 40.538,50.571 86.8,51 23.698,51.105 25.806,51.257 93.2,51.5 95.8,51.9 43.536,52.045 13.945,52.121 23.216,52.324 18.491,52.476 49.809,52.502 60.4,52.6 58.801,52.705 3.683,52.73 62.2,53.9 9.779,53.95 43.485,54.153 13.868,54.94 17.247,54.966 22.53,54.966 19.456,55.016 25.502,55.118 39.472,55.474 37.313,55.829 7.01,55.931 31.293,56.21 2.769,56.236 34.3,56.4 60.96,56.642 10.947,56.769 53.416,57.404 37.389,57.429 96.4,57.7 51.054,57.81 25.857,57.887 60.96,57.887 31.4,58.3 33.757,58.75 11.405,59.284 49.251,59.868 52.832,59.893 2.616,59.969 40.996,60.554 65.151,60.808 53.746,61.265 96.3,61.3 61.062,61.595 65.964,61.747 63.983,61.773 37.084,62.103 3.912,62.636 47.269,62.713 49.174,62.713 51.105,62.713 10.973,63.297 88.9,63.6 40.8,64.1 86.8,64.2 90.4,64.5 30.683,64.821 34.163,64.846 41.6,65 54.102,65.583 47.879,65.634 49.174,65.634 50.648,65.634 96.3,65.7 63.83,65.735 56.7,66 62.89,66.091 73.1,66.2 54.483,67.945 47.1,68 9.398,69.494 73.7,70.1 65.329,70.206 66.497,70.206 4.775,70.46 31.3,70.5 34.1,70.5 38.6,70.5 77.7,70.7 72.7,71.1 2.591,71.984 4.521,72.365 25.273,73.635 21.692,74.168 86,74.9 64,75 67.75,75 30,75.1 95.4,75.2 59.75,75.25 73.4,75.7 22.657,75.794 42,75.9 24.917,75.946 33.1,76.1 20.549,76.378 42,77 73.838,77.419 75.7,77.6 31,77.8 80.5,77.8 90.3,77.8 33.2,78 35,78 87.1,78.3 17.932,78.384 70.282,78.918 2.184,79.832 15.723,79.959 15.723,81.61 60.96,81.813 63.398,81.839 67.818,82.067 4.724,82.525 6.579,82.702 71.4,82.7 33.5,83 15.723,83.058 54.686,83.185 59.436,83.185 43.4,83.2 34.5,83.6 86.9,83.9 90.8,83.9 33.5,84.1 80.8,84.4 60.681,84.582 54.762,84.658 34.5,84.7 58.166,84.76 43.586,85.014 33.5,85.2 6.782,85.573 76.5,85.7 71.374,85.725 34.5,85.8 16.713,86.106 28.727,86.182 33.5,86.2 54.7,86.7 60.96,86.766 82.347,86.944 42.951,87.96 65.4,88.1 66.2,88.1 67,88.1 28.346,88.316 48.26,88.519 46.228,88.57 23.52,88.671 56.871,88.875 65.3,89.1 66.2,89.2 50.292,89.433 87.1,89.5 79.7,89.6 40,89.75 70.866,89.789 54.61,89.865 64.8,89.9 65.7,89.9 43.739,90.297 65.2,90.6 9.779,90.653 64.3,90.7 13.157,90.78 65.3,91.5 57.023,91.516 53.34,91.542 37.846,91.948 45.669,91.973 65.4,92.4 40.538,92.71 50.902,92.735 55.042,93.015 65.4,93.5 52.807,93.574 13.03,93.828 65.4,94.5 62.027,94.564 38.075,94.767 50.343,95.174 10.75,95.25 54.406,95.35 80.01,95.631 61.62,95.783 82.779,95.885 70.282,96.037 90.8,97.8 16.5,98 20.5,98 24.5,98 28.75,98 33.25,98 13.03,98.476
I2C1_SCL: R45.1 U4.92 U12.6 | length 29.7
  Top Layer w0.254: U12.6@36.588,84.46 v1(38.25,84.46) 38.46,84.46 39.25,85.25 R45.1@39.75,85.25 ; v1(37,81) 37,74.5 37.968,73.532 47.468,73.532 49.294,71.706 U4.92@49.294,69.848
  Bottom Layer w0.254: v1(37,81) 37,84 37.46,84.46 v1(38.25,84.46)
I2C1_SDA: R46.1 U4.93 U12.5 | length 30.6
  Top Layer w0.254: U12.5@36.588,83.19 36.648,83.25 R46.1@39.75,83.25 39.75,82.5 39.25,82 36.75,82 36.25,81.5 36.25,74 37.226,73.024 47.226,73.024 48.794,71.456 U4.93@48.794,69.848
JTCK: JTAG.9 R32.1 U4.76 | length 24.5
  Top Layer w0.254: v1(50.8,73.5) 56.25,73.5 57.294,72.456 U4.76@57.294,69.848
  Top Layer w0.5: R32.1@41.25,80.75 41.75,81.25 JTAG.9@44.09,81.25
  Bottom Layer w0.254: JTAG.9@44.09,81.25 45.4,79.94 45.4,77.953 45.857,77.495 47.368,77.495 49.403,75.46 49.403,74.055 49.839,73.619 50.681,73.619 v1(50.8,73.5)
JTDI: JTAG.5 R30.2 U4.77 | length 22.4
  Top Layer w0.254: JTAG.5@49.17,81.25 50.5,79.92 50.5,78.1 49.2,76.8 49.2,74.027 50.711,72.516 55.984,72.516 56.794,71.706 U4.77@56.794,69.848
  Top Layer w0.5: JTAG.5@49.17,81.25 49.25,81.33 R30.2@49.25,84.849
JTDO: JTAG.6 R36.2 U4.89 | length 22.7
  Top Layer w0.254: R36.2@45.25,84.849 45.25,80.75 46,80 47.88,80 JTAG.6@49.17,78.71 ; U4.89@50.794,69.848 50.794,68.506 51.2,68.1 v1(51.5,68.1)
  Bottom Layer w0.254: JTAG.6@49.17,78.71 49.17,77.13 51.5,74.8 v1(51.5,68.1)
JTMS: JTAG.7 R31.2 U4.72 | length 31.2
  Top Layer w0.254: v1(50.1,74.25) 60,74.25 60.492,73.758 60.492,67.242 60.048,66.798 U4.72@58.844,66.798
  Top Layer w0.5: JTAG.7@46.63,81.25 47.25,81.87 R31.2@47.25,84.849
  Bottom Layer w0.254: JTAG.7@46.63,81.25 47.9,79.98 47.9,77.682 50.1,75.482 v1(50.1,74.25)
JTRST: JTAG.3 R29.2 U4.90 | length 22.5
  Top Layer w0.254: v1@50.294,67.8 U4.90@50.294,69.848
  Top Layer w0.5: R29.2@51.25,84.849 51.25,81.71 JTAG.3@51.71,81.25
  Bottom Layer w0.254: v1(50.3,67.8) 50.908,67.8 51.239,67.469 51.761,67.469 52.131,67.839 52.131,74.887 50.5,76.518 50.5,80.04 JTAG.3@51.71,81.25
LED1: D6.2 U4.1 | length 20.4
  Top Layer w0.254: D6.2@23.915,69.716 25.333,68.298 U4.1@43.744,68.298
LED2: D7.2 U4.2 | length 20
  Top Layer w0.254: D7.2@23.915,67.466 24.247,67.798 U4.2@43.744,67.798
LED3: D8.2 U4.3 | length 20.7
  Top Layer w0.254: D8.2@23.915,65.216 25.997,67.298 U4.3@43.744,67.298
LED4: D9.2 U4.4 | length 21.4
  Top Layer w0.254: D9.2@23.915,62.966 27.747,66.798 U4.4@43.744,66.798
MIC+: C20.1 C21.1 J1.1 U5.19 | length 50.2
  Top Layer w0.254: U5.19@67,25.5 67.158,25.658 67.158,30.226 67.894,30.963 v1(83.668,30.963)
  Top Layer w0.5: C21.1@90.25,16 v1(91.5,16) C20.1@92.75,16 92.75,12.04 J1.1@92.42,11.71
  Bottom Layer w0.254: v1(83.668,30.963) 83.668,17.94 85.115,16.492 91.008,16.492 v1(91.5,16)
MIC-: C20.2 C22.1 J1.2 U5.20 | length 52.3
  Top Layer w0.254: U5.20@68,25.5 67.843,25.657 67.843,29.845 68.275,30.277 v1@84.226,30.277
  Top Layer w0.5: J1.2@94.96,11.71 94.401,12.269 C20.2@94.401,16 v1(95.6,16) C22.1@96.75,16
  Bottom Layer w0.254: v1(84.226,30.302) 84.226,18.099 85.326,17 94.6,17 v1(95.6,16)